# Altium PCB PCB.PcbDoc
Units mm, origin at the board's own origin, x right, y up, seen from the top; angles counter-clockwise.
Board outline 52 x 84 mm, 2 copper layers (Top Layer, Bottom Layer); 14 components, 13 nets, 89 pads, 75 vias.
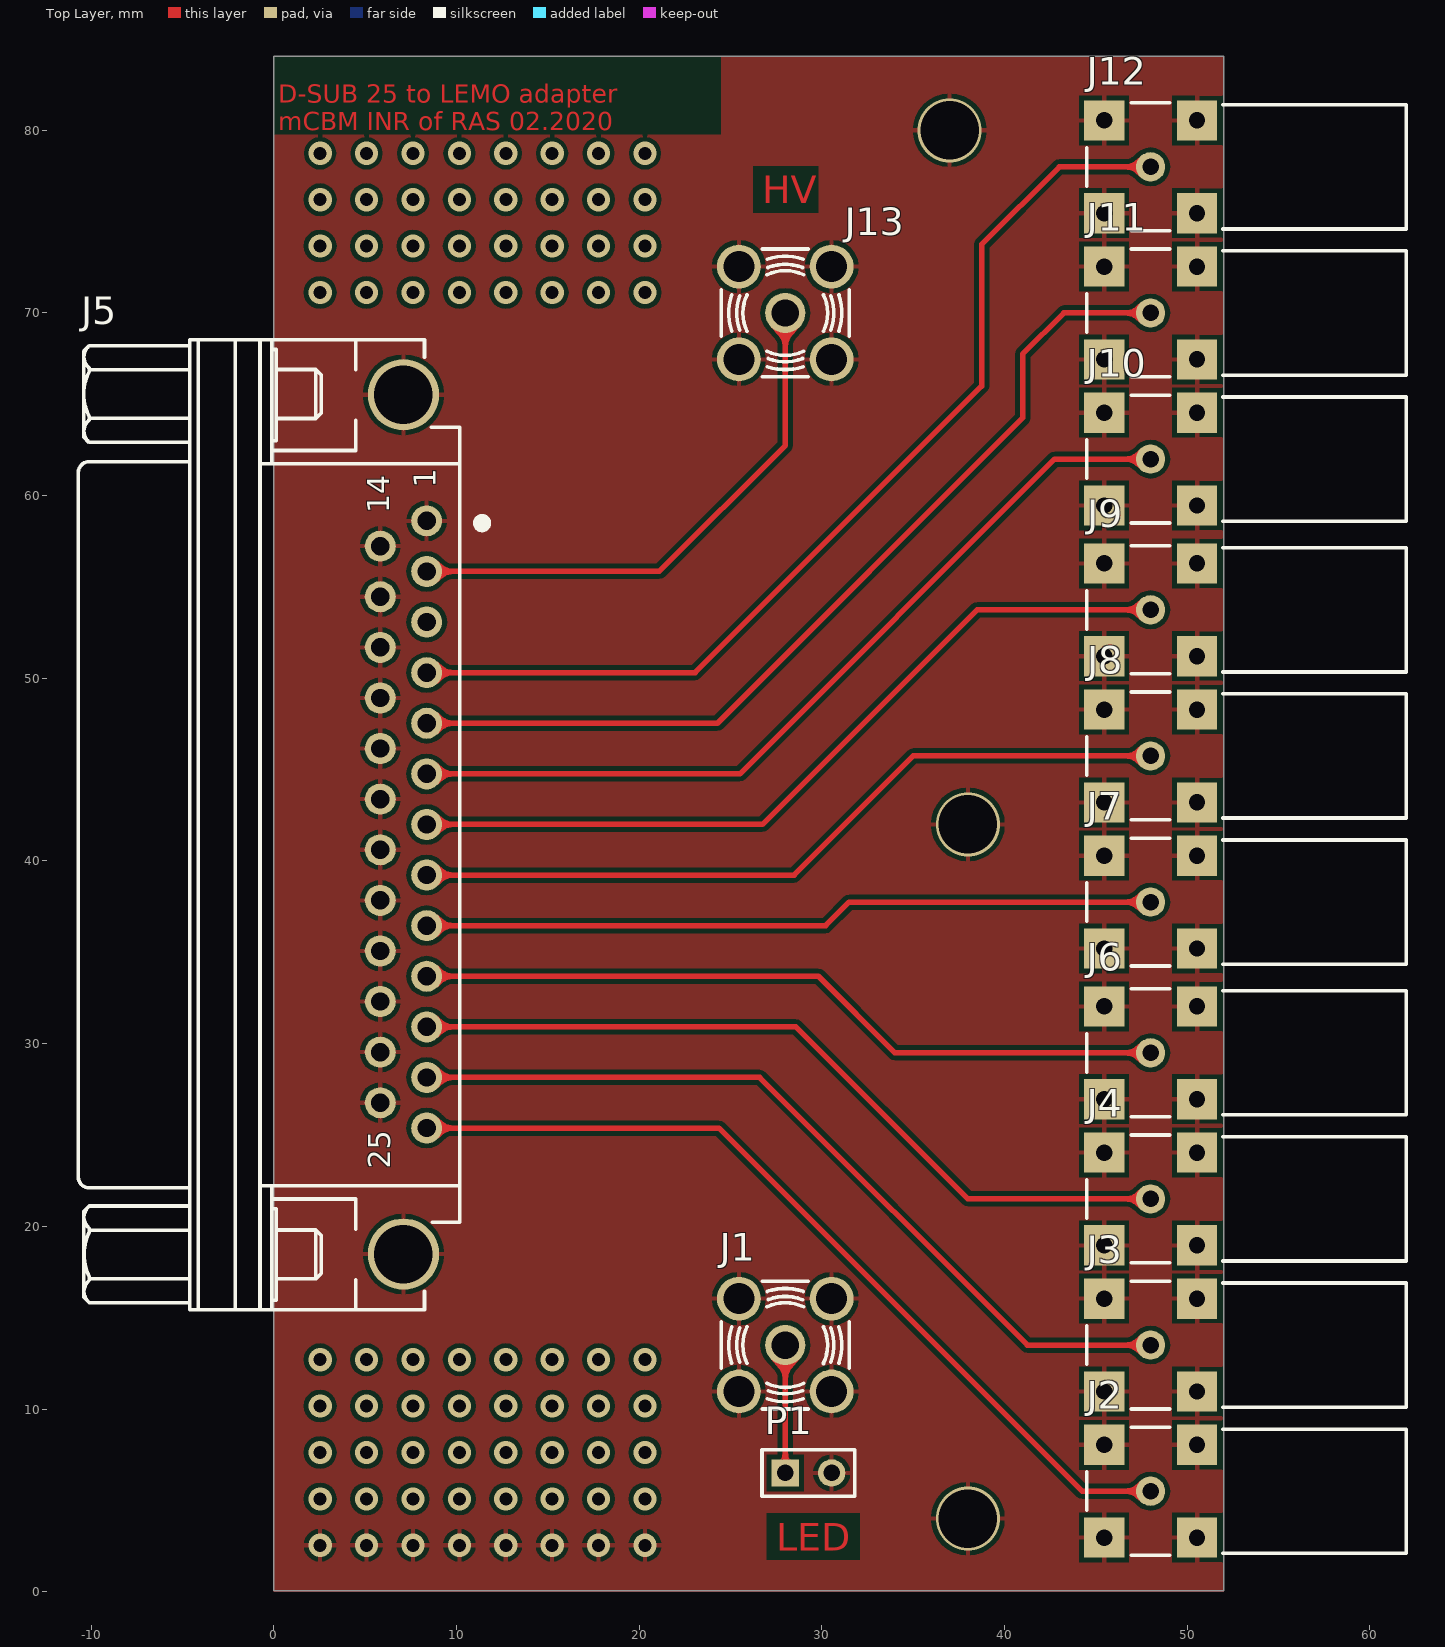
[diagram p0: Top Layer view]
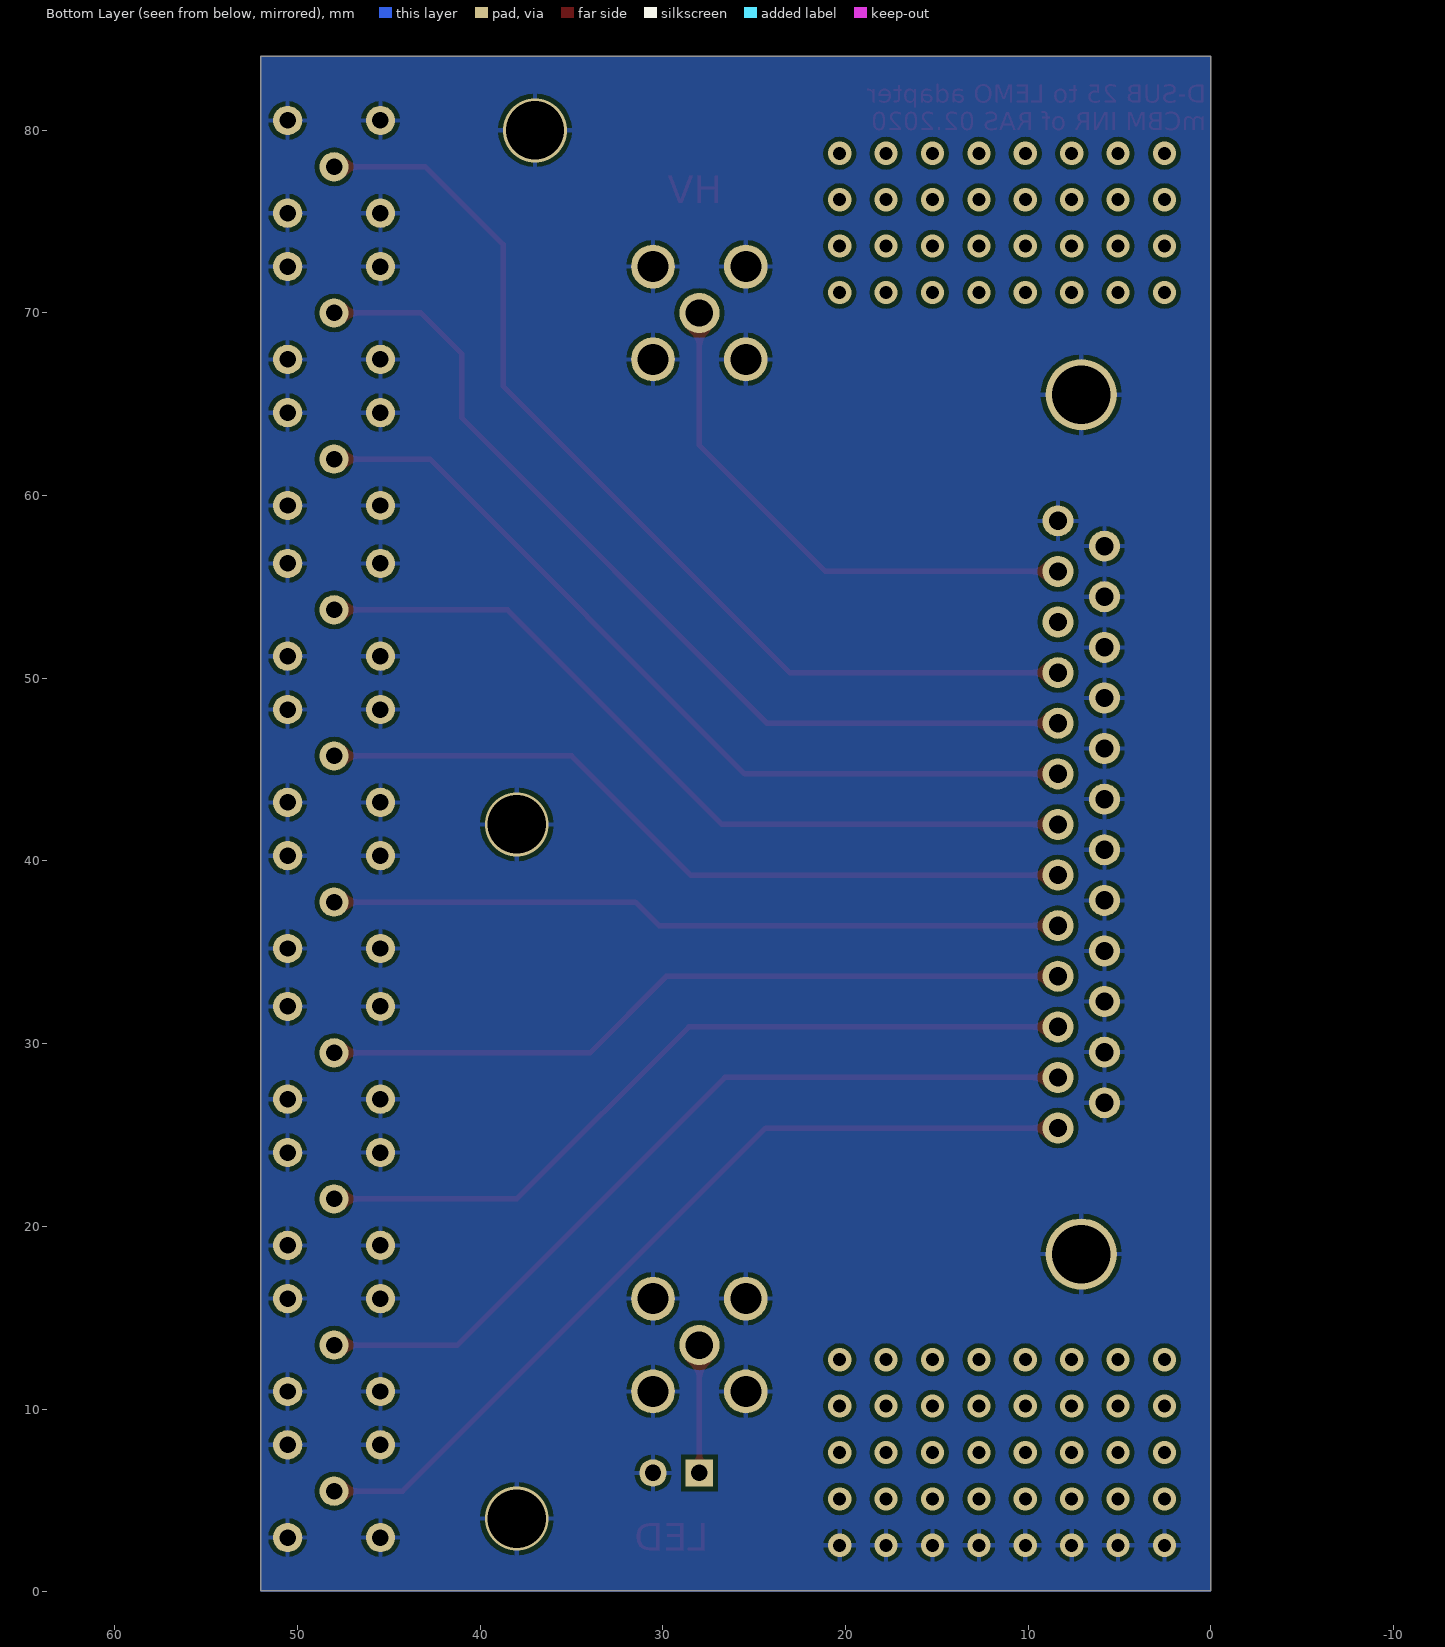
[diagram p1: Bottom Layer view, seen from below]
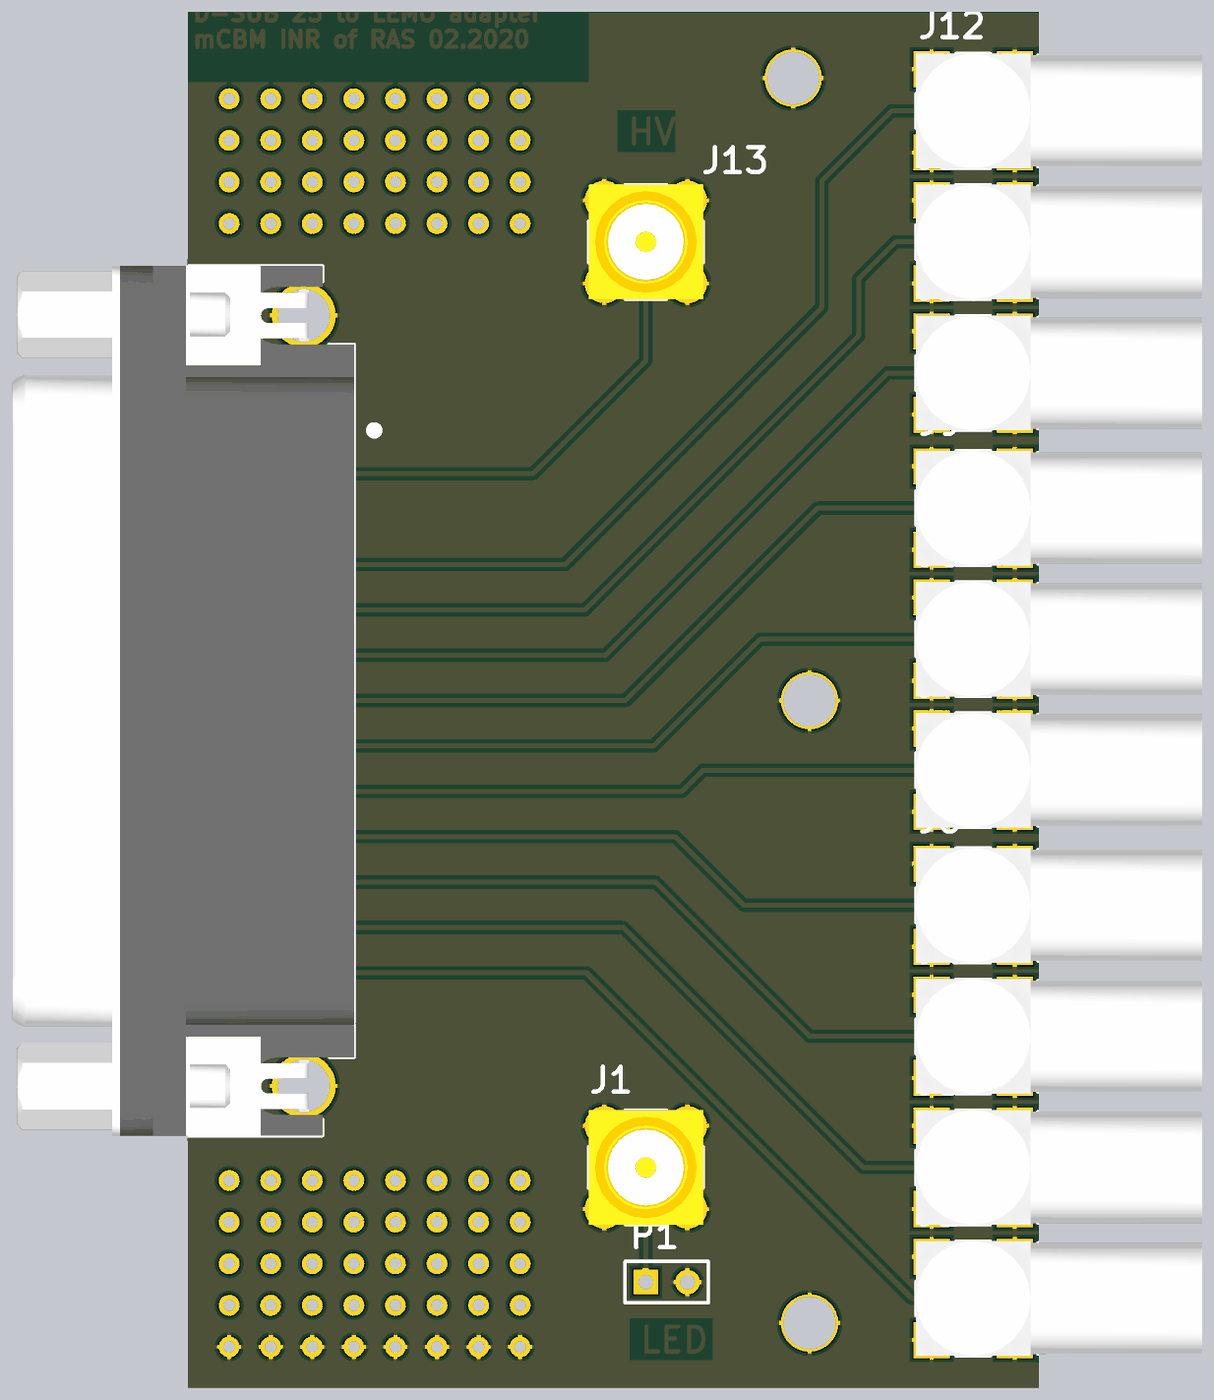
[diagram p2: 3D render of the assembled board from above, using the file's embedded part models]

## Layer stack, top to bottom
Top Solder: solder mask 0.0102, Solder Resist, Dk 3.5
Top Layer: signal copper 0.0356
Dielectric 1: dielectric 0.32, FR-4, Dk 4.8
Bottom Layer: signal copper 0.0356
Bottom Solder: solder mask 0.0102, Solder Resist, Dk 3.5

## Board outline
0,0.05 52,0.05 52,84.05 0,84.05

## Design rules (kind name [scope] priority, off if disabled: settings)
Clearance [All] p1: gap=0.254 ignorepadtopadclearanceinfootprint=FALSE except(0: Arc-Hole Track-Hole SMDPad-Hole THPad-Hole Via-Hole Fill-Hole Poly-Hole Region-Hole Text-Hole)
PolygonConnect [All] p1: connectstyle=Relief reliefconductorwidth=0.254 reliefentries=4 polygonreliefangle="90 Angle" airgapwidth=0.254
RoomDefinition SCH [InComponentClass('SCH')] p1: confinementstyle=ConfineIn formatcopy=TRUE lockcomponents=FALSE outline 153.543,-6.526 290.195,-6.526 290.195,32.082 153.543,32.082
RoutingVias [All] p1: holewidth=0.711 width=1.27 viastyle="Through Hole" minholewidth=0.711 minwidth=1.27 maxholewidth=0.711 maxwidth=1.27
SolderMaskExpansion [All] p1: expansion=0.102
Width [All] p1: maxlimit=0.3 minlimit=0.15 preferedwidth=0.2
30 further rules are at their usual default settings.

## Components (designator, comment, footprint, x,y, rotation, side; value= is the part's Value field where it differs from the comment)
J1 "SMA" AMPHENOL_132134 28,13.5 r0 top
J2 "LEMO 00" LEMO_EPK.00.250.NTN 48,5.5 r0 top
J3 "LEMO 00" LEMO_EPK.00.250.NTN 48,13.5 r0 top
J4 "LEMO 00" LEMO_EPK.00.250.NTN 48,21.5 r0 top
J5 "D-Sub" TYCO_3-1634582-2 7.1,42 r90 top
J6 "LEMO 00" LEMO_EPK.00.250.NTN 48,29.5 r0 top
J7 "LEMO 00" LEMO_EPK.00.250.NTN 48,37.75 r0 top
J8 "LEMO 00" LEMO_EPK.00.250.NTN 48,45.75 r0 top
J9 "LEMO 00" LEMO_EPK.00.250.NTN 48,53.75 r0 top
J10 "LEMO 00" LEMO_EPK.00.250.NTN 48,62 r0 top
J11 "LEMO 00" LEMO_EPK.00.250.NTN 48,70 r0 top
J12 "LEMO 00" LEMO_EPK.00.250.NTN 48,78 r0 top
J13 "SMA" AMPHENOL_132134 28,70 r90 top
P1 "Header 2" HDR1X2 28,6.5 r0 top

## Footprints (in the part's own frame and the unit in brackets; to place one, negate y for a bottom-side part, rotate by r counter-clockwise, add the part's x,y. Pads: shape width x height; smd on the part's side, far side on the other; paste and mask are expansions set on the pad)
AMPHENOL_132134 [mm] "50 Ohm Through Hole SMA Straight PCB Jack"
  round 2.2 hole 1.5: 1(0,0)
  round 2.4 hole 1.7: 2(-2.54,-2.54) 2(-2.54,2.54) 2(2.54,-2.54) 2(2.54,2.54)
  silkscreen extent -3.5,-3.5 3.5,3.5, body extent -3.5,-3.5 3.5,3.5, height 9.53
HDR1X2 [mm] "Connector; Header; 2 Position"
  rect 1.5x1.5 hole 0.9: 1(0,0)
  round 1.5 hole 0.9: 2(2.54,0)
  silkscreen extent -1.27,-1.27 3.81,1.27
LEMO_EPK.00.250.NTN [mm] "50 Ohm size 00 Coaxial Elbow (90°) socket"
  round 1.6 hole 0.9: 1(0,0)
  rect 2.2x2.2 / inner round 1.6 / far side round 1.6 hole 0.9: 2(-2.54,-2.54) 2(-2.54,2.54) 2(2.54,-2.54) 2(2.54,2.54)
  silkscreen extent -3.5,-3.5 14,3.5, body extent -3.5,-3.5 14,3.5, height 7
TYCO_3-1634582-2 [mm] "Right Angle 25 Male Contacts D-SUB Connector With Boardlock and 4-40 UNC Screwlocks"
  round 1.7 hole 1: 1(16.62,-1.27) 2(13.85,-1.27) 3(11.08,-1.27) 4(8.31,-1.27) 5(5.54,-1.27) 6(2.77,-1.27) 7(0,-1.27) 8(-2.77,-1.27) 9(-5.54,-1.27) 10(-8.31,-1.27) 11(-11.08,-1.27) 12(-13.85,-1.27) 13(-16.62,-1.27) 14(15.235,1.27) 15(12.465,1.27) 16(9.695,1.27) 17(6.925,1.27) 18(4.155,1.27) 19(1.385,1.27) 20(-1.385,1.27) 21(-4.155,1.27) 22(-6.925,1.27) 23(-9.695,1.27) 24(-12.465,1.27) 25(-15.235,1.27)
  round 3.9 hole 3.2: 26(-23.52,0) 27(23.52,0)
  silkscreen extent -26.57,-4.55 26.53,17.8, body extent -26.57,-3.08 26.53,17.8, height 13.57

## Part data
J1 J13: library part AMPHENOL_132134, Manufacturer=AMPHENOL, Manufacturer Part Number=132134, Author="CERN DEM JLC", ComponentHeight=9.53mm, Component Type=Standard, CreateDate=16.12.2013, Family=SMA, HelpURL=\\cern.ch\dfs\Applications\Altium\Datasheets\AMPHENOL_132134.pdf, LatestRevisionDate=16.12.2013, Mounted=Yes, Part Description="50 Ohm Through Hole SMA Straight PCB Jack", Part Number=AMPHENOL_132134, Pin Count=4, PressFit=No, Sense=No, SMD=No, Socket=No, Status=None
J2 J3 J4 J6 J7 J8 J9 J10 J11 J12: library part LEMO_EPK.00.250.NTN, Manufacturer=LEMO, Manufacturer Part Number=EPK.00.250.NTN, Author="CERN DEM JLC", ComponentHeight=7mm, Component Type=Standard, CreateDate=04.09.2012, Family="LEMO 00", HelpURL=\\cern.ch\dfs\Applications\Altium\Datasheets\LEMO_EPK.00.250.NTN.pdf, LatestRevisionDate=04.09.2012, Mounted=Yes, Part Description="Size 00, 50 Ohms Coaxial Elbow (90°) socket With Clearance Under The Body", Part Number=LEMO_EPK.00.250.NTN, Pin Count=2, PressFit=No, SCEM=09.46.11.180.6, Sense=No, SMD=No, Socket=No, Status=None
J5: library part TYCO_3-1634582-2, "Connector D-sub 25 Male", Manufacturer="TYCO ELECTRONICS", Manufacturer Part Number=3-1634582-2, Author="CERN DEM JLC", ComponentHeight=13.57mm, Component Type=Standard, CreateDate=17.01.2013, Family=D-Sub, HelpURL=\\cern.ch\dfs\Applications\Altium\Datasheets\TYCO_3-1634582-2.pdf, LatestRevisionDate=17.01.2013, Mounted=Yes, Part Description="Right Angle 25 Male Contacts D-SUB Connector With Boardlock and 4-40 UNC Screwlocks", Part Number=TYCO_3-1634582-2, Pin Count=27, PressFit=No, Sense=No, SMD=No, Socket=No, Status=None
P1: "Header, 2-Pin", LatestRevisionDate=17-Jul-2002, LatestRevisionNote="Re-released for DXP Platform.", Publisher="Altium Limited"

## Via types
v1: diameter 1.27, hole 0.711, Top Layer to Bottom Layer, 72 vias
v2: diameter 3.5, hole 3.2, Top Layer to Bottom Layer, 3 vias

## Nets (pads, with @x,y where several pads share a name; then routed paths per layer and width w, separated by ;. In a path a pad name is that pad's centre, name@x,y a point inside that pad or via, vN(x,y) a via of type N, cw(c..) or ccw(c..) an arc to the next point about the centre after c; other vN are vias at no path point)
GND: J1.2 J2.2 J3.2 J4.2 J5.1 J5.14 J5.15 J5.16 J5.17 J5.18 J5.19 J5.20 J5.21 J5.22 J5.23 J5.24 J5.25 J5.26 J5.27 J6.2 J7.2 J8.2 J9.2 J10.2 J11.2 J12.2 J13.2 P1.2
  other v1: 2.54,2.54 5.08,2.54 7.62,2.54 10.16,2.54 12.7,2.54 15.24,2.54 17.78,2.54 20.32,2.54
  other v2: 38,4 38,42 37,80
NetJ1_1: J1.1 P1.1 | length 6.8
  Top Layer w0.3: P1.1@28,6.687 J1.1
NetJ2_1: J2.1 J5.13 | length 47.9
  Top Layer w0.3: J5.13 24.37,25.38 44.25,5.5 J2.1
NetJ3_1: J3.1 J5.12 | length 45.7
  Top Layer w0.3: J5.12 26.6,28.15 41.25,13.5 J3.1
NetJ4_1: J4.1 J5.11 | length 43.5
  Top Layer w0.3: J5.11 28.58,30.92 38,21.5 J4.1
NetJ5_2: J5.2 J13.1 | length 29.7
  Top Layer w0.3: J5.2 21.1,55.85 28,62.75 J13.1
NetJ5_4: J5.4 J12.1 | length 55.6
  Top Layer w0.3: J5.4 23.06,50.31 38.75,66 38.75,73.75 43,78 J12.1
NetJ5_5: J5.5 J11.1 | length 51
  Top Layer w0.3: J5.5 24.29,47.54 41,64.25 41,67.75 43.25,70 J11.1
NetJ5_6: J5.6 J10.1 | length 46.8
  Top Layer w0.3: J5.6 25.52,44.77 42.75,62 J10.1
NetJ5_7: J5.7 J9.1 | length 44.5
  Top Layer w0.3: J5.7 26.75,42 38.5,53.75 J9.1
NetJ5_8: J5.8 J8.1 | length 42.3
  Top Layer w0.3: J5.8 28.48,39.23 35,45.75 J8.1
NetJ5_9: J5.9 J7.1 | length 40.2
  Top Layer w0.3: J5.9 30.21,36.46 31.5,37.75 J7.1
NetJ5_10: J5.10 J6.1 | length 41.4
  Top Layer w0.3: J5.10 29.81,33.69 34,29.5 J6.1
pads on no net: J5.3
copper on no net:
  other v1: 2.54,5.08 5.08,5.08 7.62,5.08 10.16,5.08 12.7,5.08 15.24,5.08 17.78,5.08 20.32,5.08 2.54,7.62 5.08,7.62 7.62,7.62 10.16,7.62 12.7,7.62 15.24,7.62 17.78,7.62 20.32,7.62 2.54,10.16 5.08,10.16 7.62,10.16 10.16,10.16 12.7,10.16 15.24,10.16 17.78,10.16 20.32,10.16 2.54,12.7 5.08,12.7 7.62,12.7 10.16,12.7 12.7,12.7 15.24,12.7 17.78,12.7 20.32,12.7 2.54,71.12 5.08,71.12 7.62,71.12 10.16,71.12 12.7,71.12 15.24,71.12 17.78,71.12 20.32,71.12 2.54,73.66 5.08,73.66 7.62,73.66 10.16,73.66 12.7,73.66 15.24,73.66 17.78,73.66 20.32,73.66 2.54,76.2 5.08,76.2 7.62,76.2 10.16,76.2 12.7,76.2 15.24,76.2 17.78,76.2 20.32,76.2 2.54,78.74 5.08,78.74 7.62,78.74 10.16,78.74 12.7,78.74 15.24,78.74 17.78,78.74 20.32,78.74

## Polygon pours and split planes (outlines as drawn)
GND on Bottom Layer "Bottom Layer-GND" (solid, pour order 2): 0,84 52,84 52,0 0,0
GND on Top Layer "Bottom Layer-GND 1" (solid, pour order 0): 0,84 52,84 52,0 0,0

## Other copper
Top Layer:
  text "D-SUB 25 to LEMO adapter / mCBM INR of RAS 02.2020" at 0.25,80 h1
  text "HV" at 26.75,76 h1.52
  text "LED" at 27.5,2.25 h1.52

## Silkscreen, mask and mechanical layers (free items; w line width, h text height)
Mechanical 1:
  lines w0.254: 82.059,12.557 92.059,12.557 ; 0,0 0,84 52,84 52,0 0,0

## Text inside footprints (layer, text, board x,y; h text height)
J5: Top Overlay "14" at 6.33,59.04 h1.2 r90; Top Overlay "25" at 6.38,23.14 h1.2 r90; Top Overlay "1" at 8.87,60.425 h1.2 r90; Mechanical 14 "14" at 6.33,59.04 h1.2 r90; Mechanical 14 "25" at 6.38,23.14 h1.2 r90; Mechanical 14 "1" at 8.87,60.425 h1.2 r90